# Altium PCB PCB1.PcbDoc
Units mil, origin at the board's own origin, x right, y up, seen from the top; angles counter-clockwise.
Board outline 6000 x 4000 mil, 2 copper layers (Top Layer, Bottom Layer); 12 components, 6 nets, 28 pads, 0 vias.
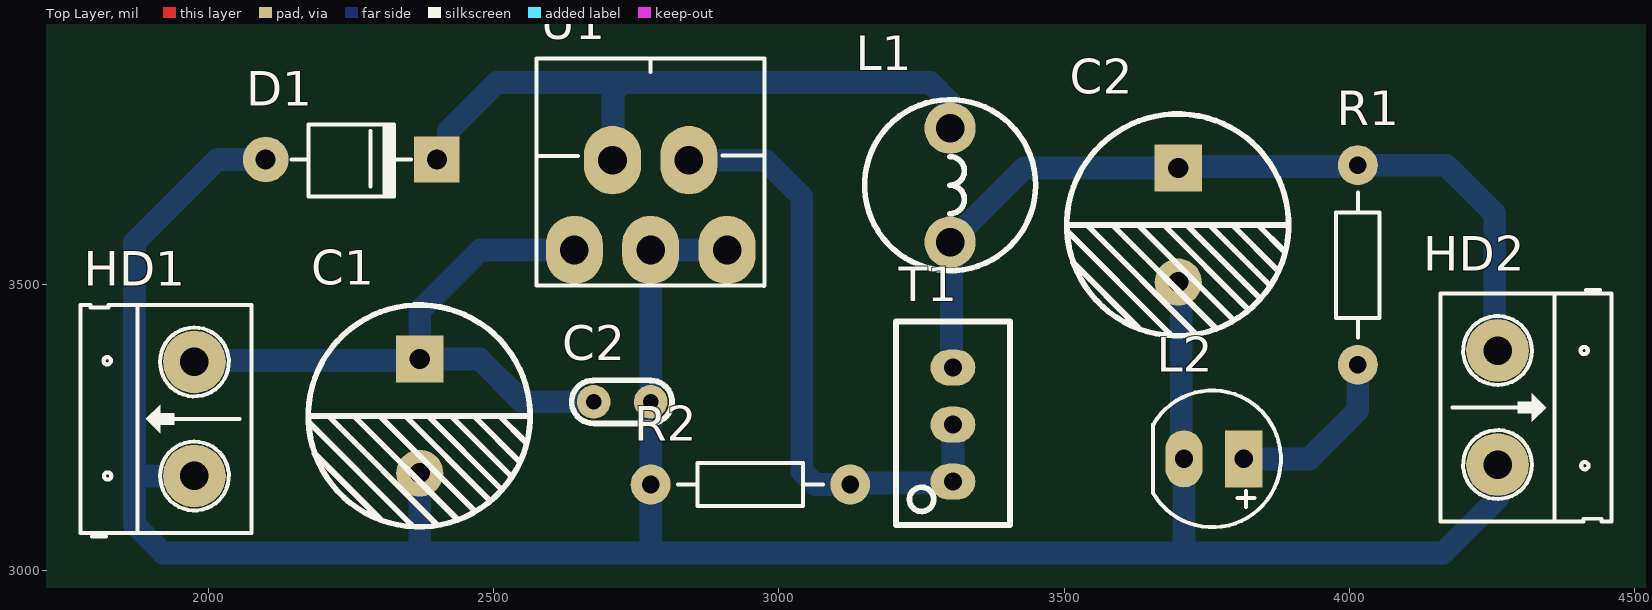
[diagram p0: Top Layer view]
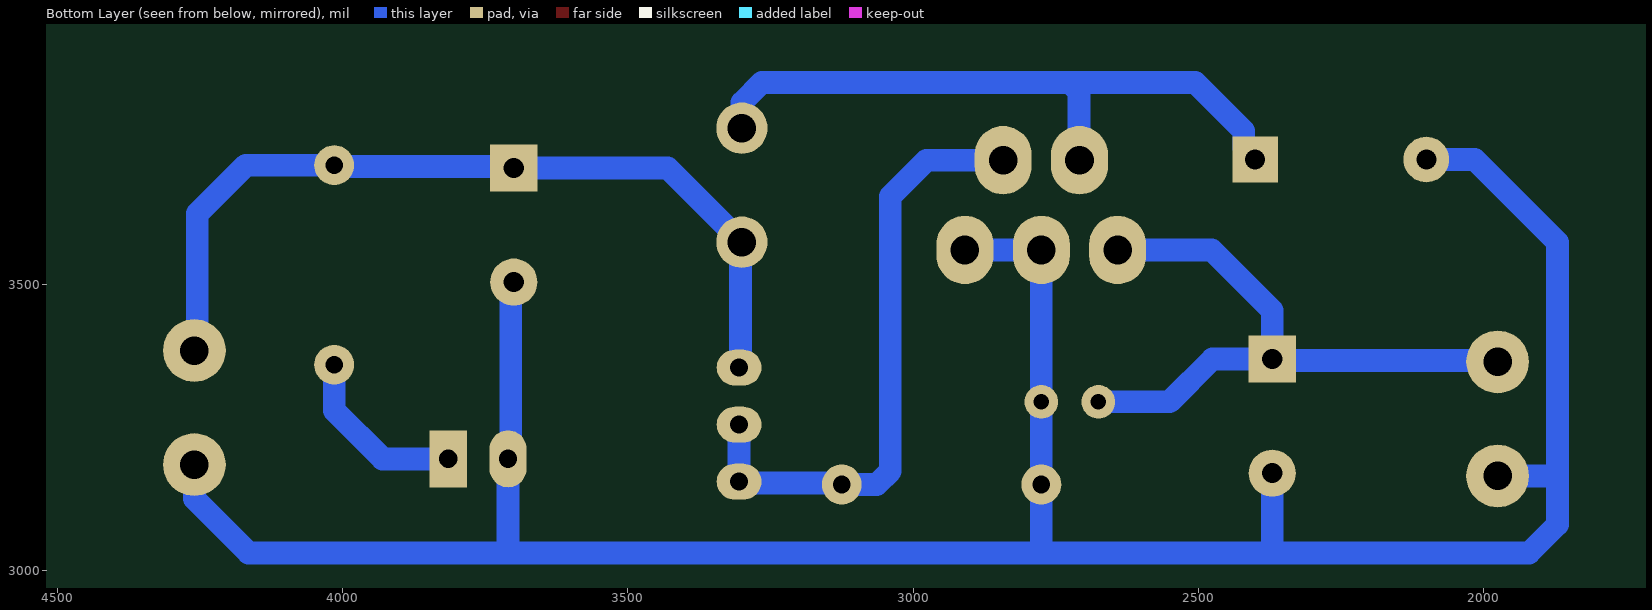
[diagram p1: Bottom Layer view, seen from below]
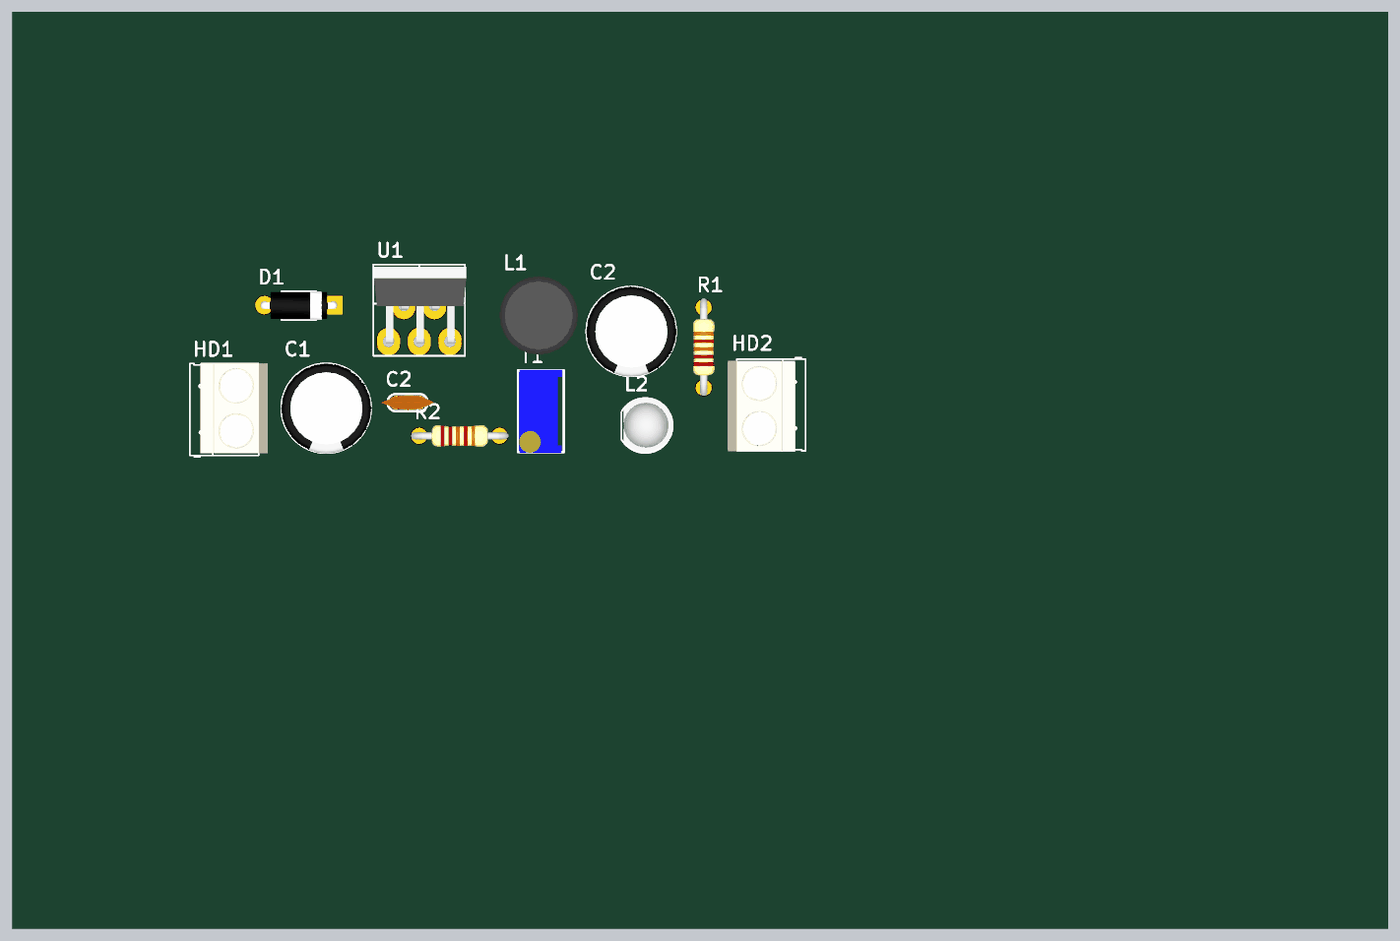
[diagram p2: 3D render of the assembled board from above, using the file's embedded part models]

## Layer stack, top to bottom
Top Solder: solder mask 0.4, Solder Resist, Dk 3.5
Top Layer: signal copper 1.4
Dielectric 1: dielectric 12.6, FR-4, Dk 4.8
Bottom Layer: signal copper 1.4
Bottom Solder: solder mask 0.4, Solder Resist, Dk 3.5

## Board outline
1000,1000 7000,1000 7000,5000 1000,5000

## Design rules (kind name [scope] priority, off if disabled: settings)
Clearance [All] p1: gap=10 ignorepadtopadclearanceinfootprint=FALSE except(0: Arc-Hole Track-Hole SMDPad-Hole THPad-Hole Via-Hole Fill-Hole Poly-Hole Region-Hole Text-Hole)
PolygonConnect [All] p1: connectstyle=Relief reliefconductorwidth=10 reliefentries=4 polygonreliefangle="90 Angle" airgapwidth=10
RoutingVias [All] p1: holewidth=28 width=50 viastyle="Through Hole" minholewidth=28 minwidth=50 maxholewidth=28 maxwidth=50
SolderMaskExpansion [All] p1: expansion=4
Width [All] p1: maxlimit=40 minlimit=40 preferedwidth=40
30 further rules are at their usual default settings.

## Classes and differential pairs
component class Nguyen_ly: C1 C2 D1 HD1 HD2 L1 L2 R1 R2 T1 U1

## Components (designator, comment, footprint, x,y, rotation, side; value= is the part's Value field where it differs from the comment)
C1 "220uF" "tu hoa 10mm" 2370,3270 r270 top
C2 "104" "tu gom" 2725,3295 r0 top
C2 "220uF" "tu hoa 10mm" 3700,3605 r270 top
D1 "1n5822" "DIODE 1A" 2050,3720 r180 top
HD1 "Header 2" HED2 1975,3165 r90 top
HD2 "Header 2" HED2 4260,3385 r270 top
L1 "100uH 3A" "CUON CAM 100uH3A" 3300,3675 r270 top
L2 "LED 5mm" LED-5MM-Green 3810,3195 r180 top
R1 "Res1" R1/4W 4015,3710 r270 top value=330
R2 "Res1" R1/4W 3125,3150 r180 top value=330
T1 "10K" "Bien Tro Vi Chinh Dung" 3305,3255 r90 top
U1 "LM2976" DIP5 2775,3640 r0 top

## Footprints (in the part's own frame and the unit in brackets; to place one, negate y for a bottom-side part, rotate by r counter-clockwise, add the part's x,y. Pads: shape width x height; smd on the part's side, far side on the other; paste and mask are expansions set on the pad)
"Bien Tro Vi Chinh Dung" [mm] "Bien tro vi chinh"
  oval 1.6x2 hole 0.8: 1(-2.54,0) 2(0,0) 3(2.54,0)
  silkscreen extent -4.47,-2.54 4.6,2.54, body extent -4.54,-2.4 4.66,2.4, height 12.02
"CUON CAM 100uH3A" [mil] "100uH3A"
  round 90 hole 50: 1(-100,0) 2(100,0)
  silkscreen extent -150,-150 150,150, body extent -171,-175 171,167, height 394
"DIODE 1A" [mil] "Diode 1A"
  round 80 hole 35: 1(-50,0)
  rect 80x80 hole 35: 2(-350,0)
  silkscreen extent -305,-61 -95,65, body extent -366,-61 -34,65, height 122
DIP5 [mm]
  oval 2.54x3.048 hole 1.27: 1(-3.4,-2) 2(-1.7,2) 3(0,-2) 4(1.7,2) 5(3.4,-2)
  silkscreen extent -5.08,-3.61 5.08,6.53, body extent -4.99,-2.25 5.21,6.31, height 18.81
HED2 [mil] "Header 2, 2 pin, hight 300mil, Pin to Pin 200, Colour Green"
  round 110 hole 50: 1(0,0) 2(200,0)
  silkscreen extent -106,-100 300,200, body extent -92,-140 302,155, height 394
LED-5MM-Green [mil] "LED 2 PIN, 5 ly , Only colour,pin to pin 100mil"
  rect 65x100 hole 32: 1(-5,0)
  oval 65x100 hole 32: 2(100,0)
  silkscreen extent -70,-120 154,120, body extent -69,-120 145,117, height 339
R1/4W [mil] "R 1/4W, 2 Pin, 350mil"
  round 70 hole 31: 1(0,0) 2(350,0)
  silkscreen extent 48,-38 302,38, body extent -40,-47 386,47, height 111
"tu gom" [mm] "Tu gom mini"
  round 1.5 hole 0.7: 1(-1.27,0) 2(1.27,0)
  silkscreen extent -2.25,-0.97 2.22,0.97, body extent -2.92,-0.85 2.92,0.85, height 6.12
"tu hoa 10mm" [mm]
  rect 2.1x2.1 hole 0.9: 1(-2.54,0)
  round 2.1 hole 0.9: 2(2.54,0)
  silkscreen extent -4.95,-4.96 4.93,4.92, body extent -5,-5 4.97,5, height 20.01

## Part data
C1 C2: library part "Tu Hoa 220uF 50V 10x14", "C?m", Chung_Loai=C?m, Don_Vi=Con, Ma_Hang=MH006873, So_Chan=2, Ten_Linh_Kien="T? Hóa 220uF 50V"
C2: library part "Tu gom 104 50V", "C?m", Chung_Loai=C?m, Don_Vi=Con, Ma_Hang=MH004761, So_Chan=2, Ten_Linh_Kien="T? g?m 104 100nF 50V"
D1: library part "Diode 1N4007", "C?m", Chung_Loai=C?m, Don_Vi=Con, Ma_Hang=MH001063, Ten_Linh_Kien="Diode 1N4007 1A (DIP)"
HD1 HD2: library part Hed2, "Header 2 (Green)"
L1: library part "CUON CAM 100uH DIP", "Dán", Chung_Loai=Dán, Don_Vi=Con, Ma_Hang=MH002209, Ten_Linh_Kien="Cu?n C?m 100uH 3A 8x10MM"
L2: library part "LED 5mm Xanh La", "C?m", Chung_Loai=C?m, Don_Vi=Con, Ma_Hang=MH008969, Ten_Linh_Kien="LED 5MM Ph? Xanh (1000c)"
R1 R2: library part Res1_1, "Resistor", Manufacturer="Generic Components", Class=Passive, Published=08/06/2000, Publisher="Altium Hobart Technology Centre", SubClass=Resistor
T1: library part "Bien Tro Tinh Chinh 10K Dung", "C?m", Chung_Loai=C?m, Don_Vi=Con, Ma_Hang=MH003232, Ten_Linh_Kien="Bi?n Tr? VR 103-10K 3296W"
U1: library part LM2596, Max Input Voltage="12 V", Max Output Current="3 (6.0 peak) A", Max Output Voltage=mV, Temperature Range="-40 to +125 degC", Category=IC-Power, Min Input Voltage=mV, Min Output Voltage=mV, Mounting Technology="Surface Mount", Status=Unreleased, Supply Voltage=mV

## Nets (pads, with @x,y where several pads share a name; then routed paths per layer and width w, separated by ;. In a path a pad name is that pad's centre, name@x,y a point inside that pad or via, vN(x,y) a via of type N, cw(c..) or ccw(c..) an arc to the next point about the centre after c; other vN are vias at no path point)
NetC1_1: C1.1 C2.1@2675,3295 HD1.2 U1.1 | length 1133.3
  Bottom Layer w40: HD1.2 1977.5,3367.5 2367.5,3367.5 C1.1 ; U1.1 2476.26,3561.26 2370,3455 C1.1 ; C2.1@2675,3295 2550,3295 2475,3370 C1.1
NetC1_2: C1.2 C2.2 D1.1 HD1.1 HD2.2 L2.2 R2.2 U1.3 U1.5 | length 4697.7
  Bottom Layer w40: HD1.1@1977.5,3167.5 HD1.1 1870,3165 ; D1.1 2015,3720 1870,3575 1870,3165 ; C1.2@2367.5,3167.5 C1.2 2370,3035 2365,3030 ; U1.5 U1.3 2775,3295 R2.2 2775,3030 ; C2.2@3700,3505 3705.22,3499.78 3705.22,3199.78 L2.2 3710,3040 3700,3030 ; HD2.2 4260,3125 4165,3030 3700,3030 ; 1870,3165 1870,3080 1920,3030 2365,3030 ; 2365,3030 2775,3030 ; 2775,3030 3700,3030
NetC2_1: C2.1@3700,3705 HD2.1 L1.2 R1.1 T1.3 | length 1510.3
  Bottom Layer w40: T1.3 3302.5,3357.5 3302.5,3572.5 L1.2 3430,3705 3700,3705 3702.5,3707.5 4012.5,3707.5 R1.1 4170,3710 4255,3625 4255,3390 HD2.1
NetD1_2: D1.2 L1.1 U1.2 | length 1176.3
  Bottom Layer w40: D1.2 2420,3740 2420,3770 2505,3855 2725,3855 ; U1.2 2708.74,3719.41 2708.74,3838.74 2725,3855 ; L1.1 3300,3820 3265,3855 2725,3855
NetL2_1: L2.1 R1.2 | length 315.2
  Bottom Layer w40: L2.1 3930,3195 4015,3280 R1.2
NetR2_1: R2.1 T1.1 T1.2 U1.4 | length 1082.8
  Bottom Layer w40: U1.4 2976.26,3718.74 3040,3655 3040,3173.43 3063.43,3150 R2.1 3127.5,3152.5 3302.5,3152.5 T1.1 T1.2